# EAGLE board BT_module (EAGLE 9.6.0)
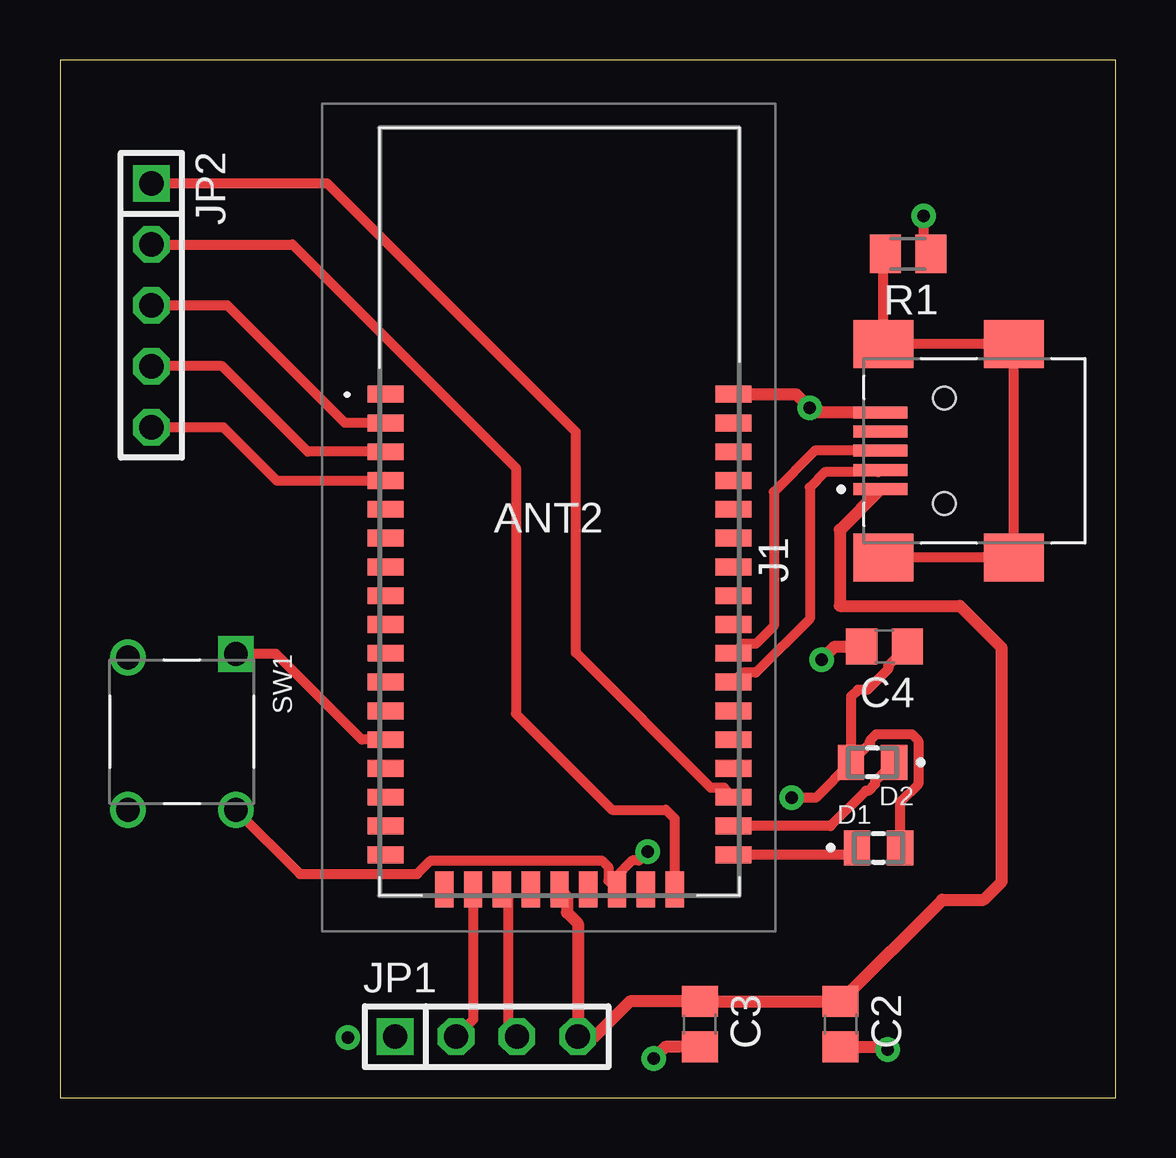
[diagram p0: board, top side]
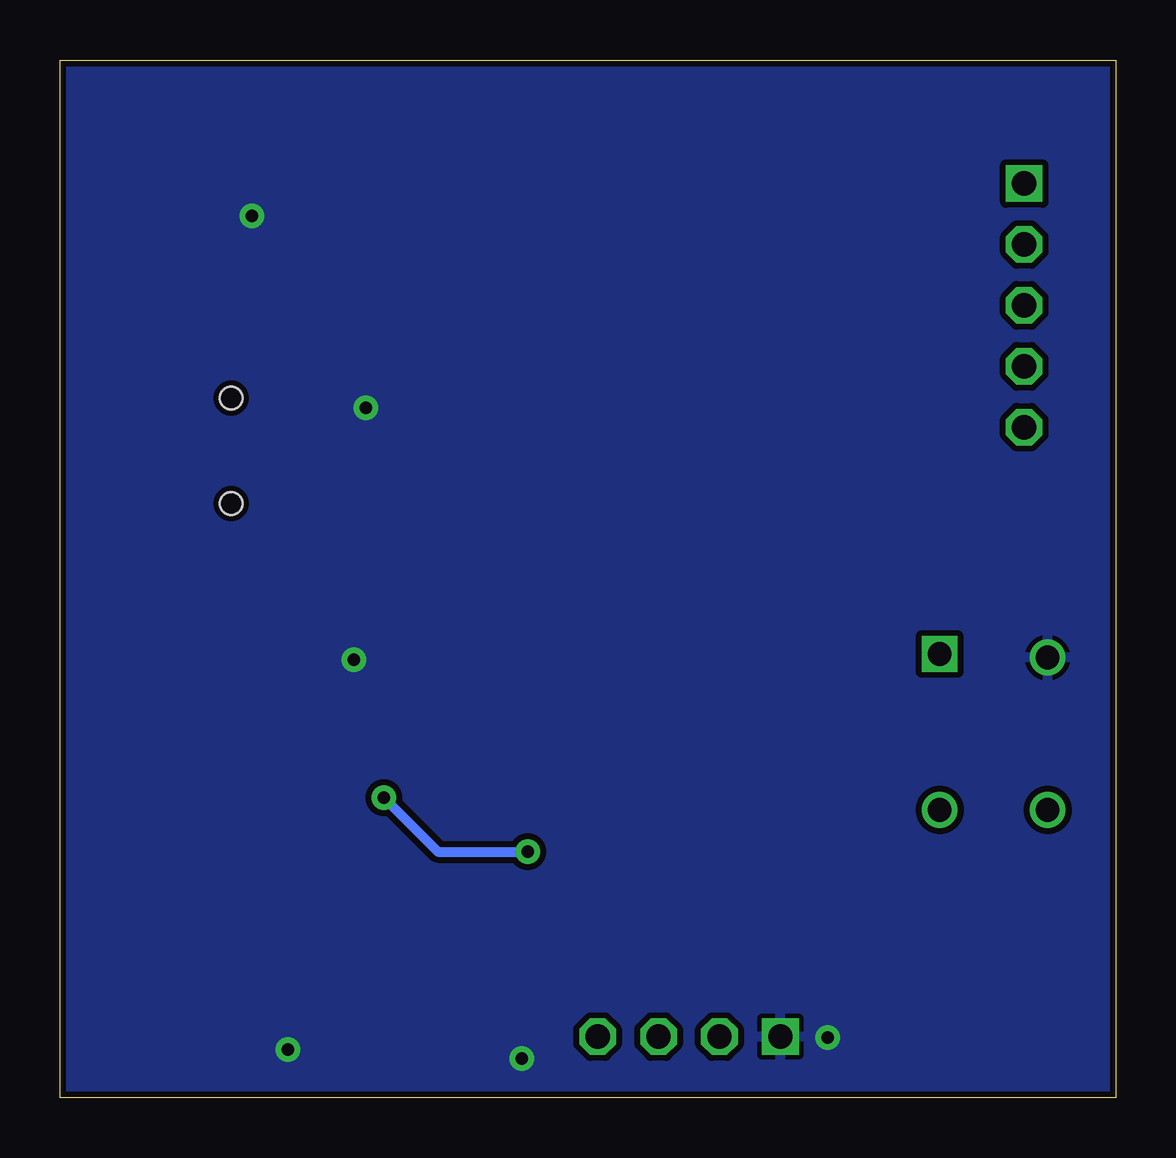
[diagram p1: board, bottom side, seen from below]

Size 44 x 43.25 mm. Coordinates in mm from the lower left corner, seen from the top.
Outline: 0,0 44,0 44,43.25 0,43.25 0,0
Copper layers (1*16): Top 0.018mm / dielectric 1.55mm / Bottom 0.018mm
Design rules "Eurocircuits_GT_panel": minimum track width 0.25mm, minimum drill 0.35mm, track to track 0.2mm, track to pad 0.2mm, pad to pad 0.2mm, via to via 0.2mm, smd to smd 0mil, copper to edge 0.25mm, drill to drill 0.35mm, minimum pad ring 0.25mm, minimum via ring 0.25mm, stop-mask expansion 0mil, vias tented up to drill 0.45mm, thermal gap 0.2mm
Net classes: 0 default: width 0.406 mm, drill 0.508 mm, clearance 0.254 mm; 1 short: width 0.305 mm, drill 0.508 mm, clearance 0.254 mm

## Footprints (pad centres in the part's own frame; a part is rotated, then mirrored left to right if it is on the bottom)
BM64SPKS1MC20001AA = smd 1.5 x 0.7: 1 -7.25,4.9; 2 -7.25,3.7; 3 -7.25,2.5; 4 -7.25,1.3; 5 -7.25,0.1; 6 -7.25,-1.1; 7 -7.25,-2.3; 8 -7.25,-3.5; 9 -7.25,-4.7; 10 -7.25,-5.9; 11 -7.25,-7.1; 12 -7.25,-8.3; 13 -7.25,-9.5; 14 -7.25,-10.7; 15 -7.25,-11.9; 16 -7.25,-13.1; 17 -7.25,-14.3; 27 7.25,-14.3; 28 7.25,-13.1; 29 7.25,-11.9; 30 7.25,-10.7; 31 7.25,-9.5; 32 7.25,-8.3; 33 7.25,-7.1; 34 7.25,-5.9; 35 7.25,-4.7; 36 7.25,-3.5; 37 7.25,-2.3; 38 7.25,-1.1; 39 7.25,0.1; 40 7.25,1.3; 41 7.25,2.5; 42 7.25,3.7; 43 7.25,4.9 | smd 0.76 x 1.5: 18 -4.8,-15.75; 19 -3.6,-15.75; 20 -2.4,-15.75; 21 -1.2,-15.75; 22 0,-15.75; 23 1.2,-15.75; 24 2.4,-15.75; 25 3.6,-15.75; 26 4.8,-15.75
C0805 = smd 1.3 x 1.5: 1 -0.95,0; 2 0.95,0
LEDC2012X70N = smd 1.1 x 1.45: A 0.9,0; C -0.9,0
AMPHENOL_10033526-N3212LF = smd 0.5 x 2.25: 1 -1.6,2.675; 2 -0.8,2.675; 3 0,2.675; 4 0.8,2.675; 5 1.6,2.675 | smd 2 x 2.5: S1 -4.45,2.55; S2 4.45,2.55; S3 -4.45,-2.9; S4 4.45,-2.9 | hole 0.95: 2.2,0; -2.2,0
1X04 = drill 1.016 square: 1 -3.81,0 | drill 1.016 octagon: 2 -1.27,0; 3 1.27,0; 4 3.81,0
1X05 = drill 1.016 square: 1 -5.08,0 | drill 1.016 octagon: 2 -2.54,0; 3 0,0; 4 2.54,0; 5 5.08,0
M0805 = smd 1.3 x 1.6: 1 -0.95,0; 2 0.95,0
TE_3-1825910-1 = drill 0.99 square: 1 -3.25,2.25 | drill 0.99: 2 3.25,2.25; 3 -3.1,-2.25; 4 3.25,-2.25

## Placement (x,y rotation side)
ANT2  BM64SPKS1MC2-0001AA  [BM64SPKS1MC20001AA]  20.82,24.42 0 top
C2  1µ  [C0805]  32.54,3.06 270 top
C3  1µ  [C0805]  26.67,3.06 270 top
C4  1µ  [C0805]  34.37,18.8 180 top
D1  598-8181-107F  [LEDC2012X70N]  34.12,10.41 0 top
D2  598-8181-107F  [LEDC2012X70N]  33.87,13.97 180 top
J1  10033526-N3212LF  [AMPHENOL_10033526-N3212LF]  36.87,26.96 90 top
JP1  [1X04]  17.78,2.54 0 top
JP2  [1X05]  3.81,33.02 270 top
R1  [M0805]  35.35,35.17 180 top
SW1  3-1825910-1  [TE_3-1825910-1]  5.08,15.24 270 top

## Library data of the parts
ANT2 = BM64SPKS1MC2-0001AA; AVAILABILITY: Warning; DESCRIPTION: Bluetooth Bluetooth v5.0 Transceiver Module 2.4GHz Integrated, Trace Surface Mount; MF: Microchip; MP: BM64SPKS1MC2-0001AA; PACKAGE: Module Microchip; PRICE: None; PURCHASE-URL: https://pricing.snapeda.com/search/part/BM64SPKS1MC2-0001AA/?ref=eda
C2-C4 = rcl; SPICEPREFIX: C
D1 D2 = 598-8181-107F; AVAILABILITY: Good; DESCRIPTION: Green 523nm LED Indication - Discrete 3.2V 0805 (2012 Metric); MF: Dialight; MP: 598-8181-107F; PACKAGE: 0805 Dialight; PRICE: None; PURCHASE-URL: https://pricing.snapeda.com/search/part/598-8181-107F/?ref=eda
J1 = 10033526-N3212LF; AVAILABILITY: Good; DESCRIPTION: USB - mini B Receptacle Connector 5 Position Surface Mount, Right Angle; MF: Amphenol ICC (FCI); MP: 10033526-N3212LF; PACKAGE: None; PRICE: None; PURCHASE-URL: https://pricing.snapeda.com/search/part/10033526-N3212LF/?ref=eda
JP1 JP2 = pinhead
R1 = rcl; SPICEPREFIX: R
SW1 = 3-1825910-1; AVAILABILITY: Good; COMMENT: 3-1825910-1; DESCRIPTION: Switch Push Button OFF (ON) SPST Round Button 0.05A 24VDC Momentary Contact PC Pins Thru-Hole; EU_ROHS_COMPLIANCE: Compliant; MF: TE Connectivity; MP: 3-1825910-1; PACKAGE: None; PRICE: None; PURCHASE-URL: https://pricing.snapeda.com/search/part/3-1825910-1/?ref=eda

## Nets
GND: ANT2.43 C2.2 C3.2 C4.2 J1.5 JP1.1 R1.1 SW1.3
N$1: ANT2.29 JP2.1
N$2: J1.S1 J1.S2 J1.S3 J1.S4 R1.2
N$3: ANT2.27 D1.C
N$4: ANT2.28 D2.C
N$5: ANT2.24 C4.1 D1.A D2.A SW1.2
N$6: ANT2.2 JP2.3
N$7: ANT2.3 JP2.4
N$8: ANT2.33 J1.2
N$9: ANT2.13 SW1.1
N$10: ANT2.4 JP2.5
N$11: ANT2.22 C2.1 C3.1 J1.1 JP1.4
N$13: ANT2.26 JP2.2
N$14: ANT2.19 JP1.2
N$15: ANT2.20 JP1.3
N$16: ANT2.34 J1.3

## Tracks (layer width: path | path; a pad name or v marks a point on that pad's centre or on a via)
GND  (via drill 0.51)
  Top 0.406: R1.1 36,35.47 v36,36.75
  Top 0.508: ANT2.43 30.68,29.32 v31.25,28.75 31.44,28.56 J1.5 | v31.75,18.25 32.3,18.8 C4.2 | C3.2 25.23,2.11 v24.75,1.63 | C2.2 34.39,2.11 v34.5,2
  other vias: 12,2.5
  pour Bottom: 0,0 0,43.25 44,43.25 44,0
N$1
  Top 0.406: ANT2.29 27.68,12.91 27.13,12.91 21.5,18.54 21.5,27.75 11.15,38.1 JP2.1
N$2
  Top 0.406: R1.2 34.32,35.09 J1.S2 J1.S4 J1.S3 J1.S1
N$3
  Top 0.406: D1.C 32.93,10.12 ANT2.27
N$4
  Top 0.406: ANT2.28 32.12,11.32 33.59,12.79 33.71,12.79 33.98,13.06 33.98,13.18 D2.C
N$5  (via drill 0.51)
  Top 0.406: D2.A 33.76,14.76 33.76,14.88 34.03,15.15 35.51,15.15 35.78,14.88 35.78,13.06 35.02,12.3 D1.A | C4.1 34.53,18.01 34.53,17.86 33.67,17 33.25,17 32.97,16.72 D2.A | 23.2,8.7 22.86,9.03 22.86,9.61 22.59,9.88 15.45,9.88 14.89,9.31 10.01,9.31 SW1.2 | 23.2,8.7 ANT2.24 | D2.A 31.5,12.5 v30.5,12.5 | v24.5,10.25 24.13,9.88 23.85,9.88 23.2,9.22 23.2,8.7
  Bottom 0.406: v30.5,12.5 28.25,10.25 v24.5,10.25
N$6
  Top 0.406: ANT2.2 11.88,28.12 6.98,33.02 JP2.3
N$7
  Top 0.406: ANT2.3 10.33,26.92 6.77,30.48 JP2.4
N$8
  Top 0.406: J1.2 34.1,26.07 31.88,26.07 31.25,25.44 31.25,19.95 29.01,17.71 28.46,17.71 ANT2.33
N$9
  Top 0.406: ANT2.13 12.58,14.92 9.01,18.49 SW1.1
N$10
  Top 0.406: JP2.5 6.81,27.94 9.03,25.72 ANT2.4
N$11
  Top 0.508: ANT2.22 21.13,8.36 21.13,7.71 21.59,7.25 JP1.4 22.29,2.54 23.76,4.01 C3.1 C2.1 36.78,8.25 38.5,8.25 39.25,9 39.25,18.75 37.5,20.5 32.5,20.5 32.5,23.66 J1.1
N$13
  Top 0.406: JP2.2 9.69,35.56 19,26.25 19,16 23,12 25.25,12 25.62,11.63 ANT2.26
N$14
  Top 0.406: ANT2.19 17.22,3.25 JP1.2
N$15
  Top 0.406: JP1.3 18.67,2.92 18.67,8.42 ANT2.20
N$16
  Top 0.406: J1.3 31.46,26.96 29.75,25.25 29.75,19.65 29.01,18.91 28.46,18.91 ANT2.34